# EAGLE board integrate (EAGLE 9.0.1)
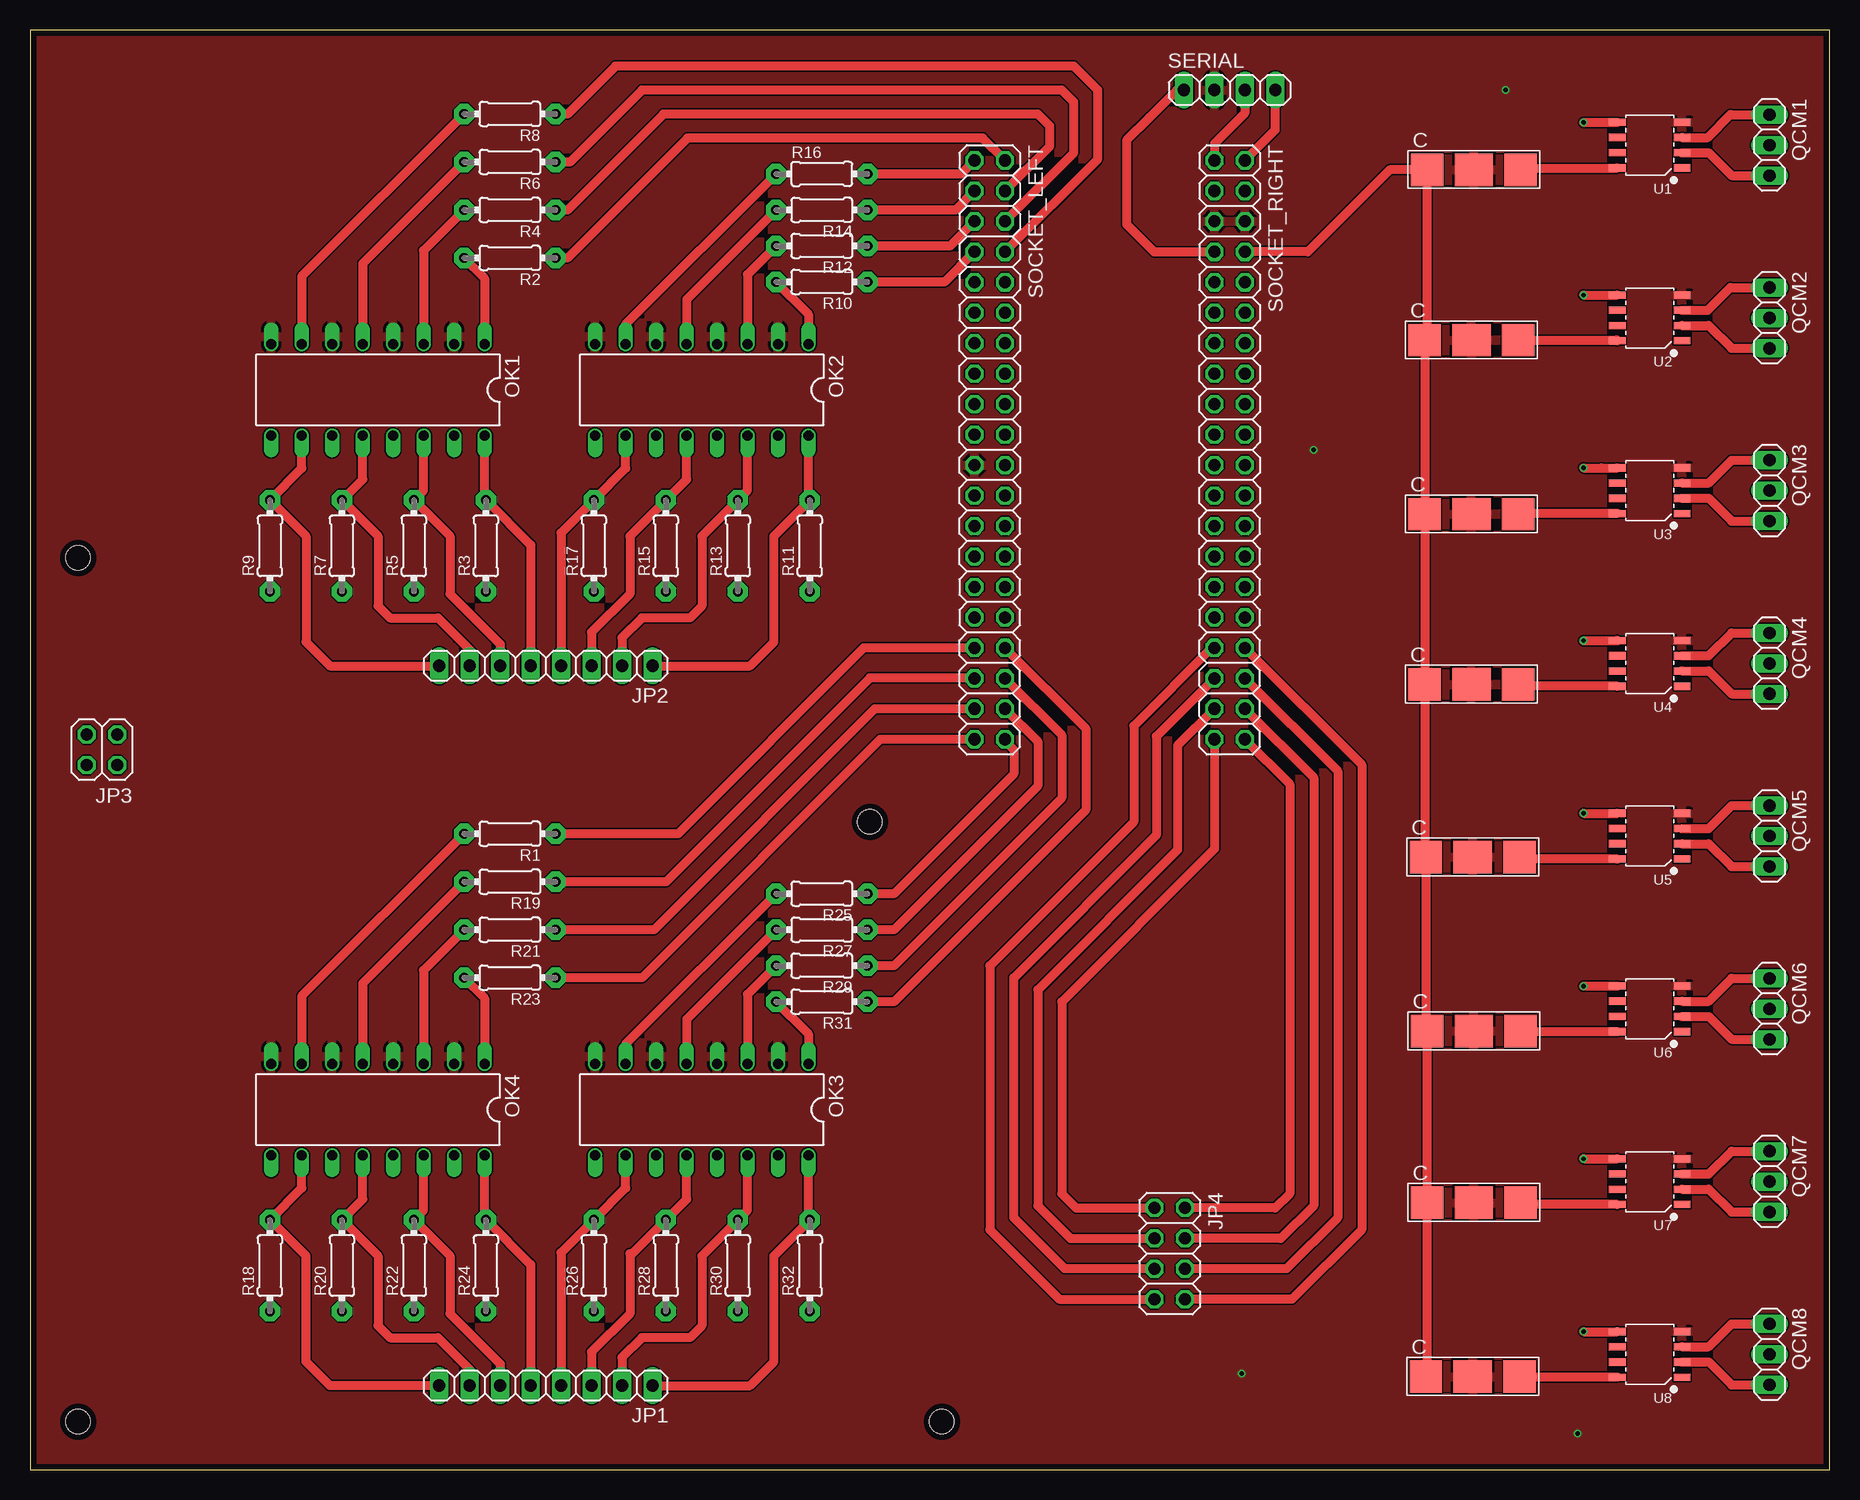
[diagram p0: board, top side]
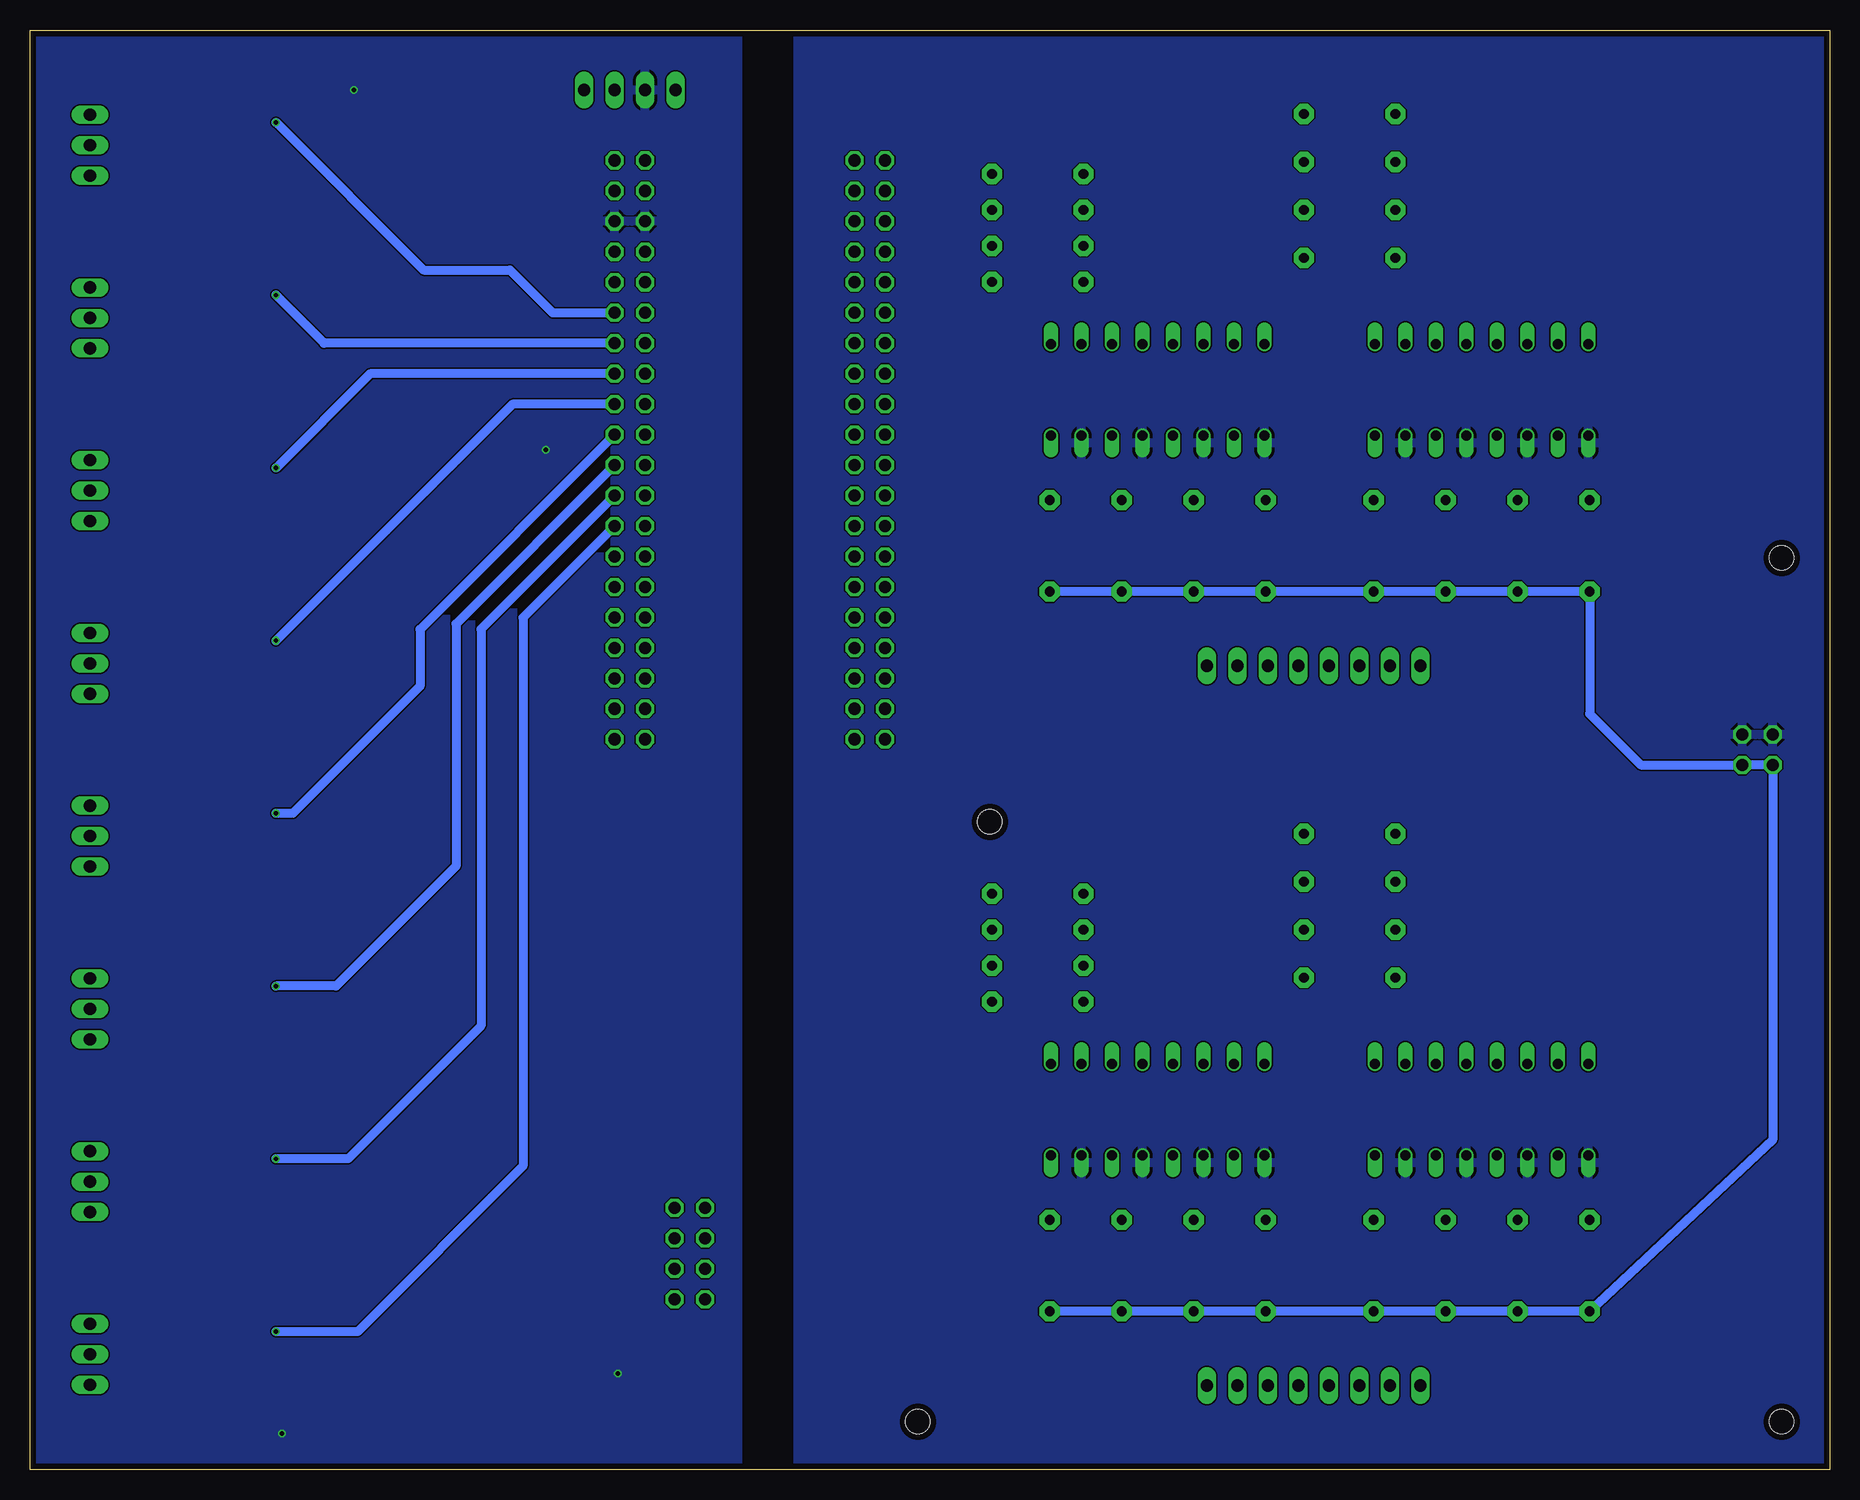
[diagram p1: board, bottom side, seen from below]

Size 150 x 120 mm. Coordinates in mm from the lower left corner, seen from the top.
Outline: 0,0 150,0 150,120 0,120 0,0
Copper layers (1*16): Top 0.035mm / dielectric 1.53mm / Bottom 0.035mm
Design rules "pban_5mil-l2": minimum track width 5mil, minimum drill 0.3mm, track to track 5mil, track to pad 0.229mm, pad to pad 5mil, via to via 5mil, smd to smd 5mil, copper to edge 0.5mm, drill to drill 0.5mm, minimum pad ring 0.15mm, minimum via ring 0.15mm, stop-mask expansion 4mil, vias tented up to drill 0.35mm, thermal gap 10mil
Net classes: 0 default: width 0.762 mm
Holes 2 mm at 4,4 76,4 4,76 70,54

## Footprints (pad centres in the part's own frame; a part is rotated, then mirrored left to right if it is on the bottom)
1X08 = drill 1.016 long: 1 -8.89,0; 2 -6.35,0; 3 -3.81,0; 4 -1.27,0; 5 1.27,0; 6 3.81,0; 7 6.35,0; 8 8.89,0
2X02 = drill 1.016 octagon: 1 -1.27,-1.27; 2 -1.27,1.27; 3 1.27,-1.27; 4 1.27,1.27
2X04 = drill 1.016 octagon: 1 -3.81,-1.27; 2 -3.81,1.27; 3 -1.27,-1.27; 4 -1.27,1.27; 5 1.27,-1.27; 6 1.27,1.27; 7 3.81,-1.27; 8 3.81,1.27
DIL16 = drill 0.813 offset: 1 -8.89,-3.81; 2 -6.35,-3.81; 3 -3.81,-3.81; 4 -1.27,-3.81; 5 1.27,-3.81; 6 3.81,-3.81; 7 6.35,-3.81; 8 8.89,-3.81; 9 8.89,3.81; 10 6.35,3.81; 11 3.81,3.81; 12 1.27,3.81; 13 -1.27,3.81; 14 -3.81,3.81; 15 -6.35,3.81; 16 -8.89,3.81
C = smd 3.2 x 2.7: MID 5.25,1.35 | smd 2.7 x 2.7: S1 1.35,1.35; S2 9.15,1.35
1X03 = drill 1.016 long: 1 -2.54,0; 2 0,0; 3 2.54,0
0204/7 = drill 0.813 pad 1.676 octagon: 1 -3.81,0; 2 3.81,0
1X04 = drill 1.016 long: 1 -3.81,0; 2 -1.27,0; 3 1.27,0; 4 3.81,0
2X20 = drill 1.016 octagon: 1 -24.13,-1.27; 2 -24.13,1.27; 3 -21.59,-1.27; 4 -21.59,1.27; 5 -19.05,-1.27; 6 -19.05,1.27; 7 -16.51,-1.27; 8 -16.51,1.27; 9 -13.97,-1.27; 10 -13.97,1.27; 11 -11.43,-1.27; 12 -11.43,1.27; 13 -8.89,-1.27; 14 -8.89,1.27; 15 -6.35,-1.27; 16 -6.35,1.27; 17 -3.81,-1.27; 18 -3.81,1.27; 19 -1.27,-1.27; 20 -1.27,1.27; 21 1.27,-1.27; 22 1.27,1.27; 23 3.81,-1.27; 24 3.81,1.27; 25 6.35,-1.27; 26 6.35,1.27; 27 8.89,-1.27; 28 8.89,1.27; 29 11.43,-1.27; 30 11.43,1.27; 31 13.97,-1.27; 32 13.97,1.27; 33 16.51,-1.27; 34 16.51,1.27; 35 19.05,-1.27; 36 19.05,1.27; 37 21.59,-1.27; 38 21.59,1.27; 39 24.13,-1.27; 40 24.13,1.27
SOIC8-1.27-5X4MM = smd 0.6 x 1.4: 1 -1.905,-2.7; 2 -0.635,-2.7; 3 0.635,-2.7; 4 1.905,-2.7; 5 1.905,2.7; 6 0.635,2.7; 7 -0.635,2.7; 8 -1.905,2.7

## Placement (x,y rotation side)
JP1  [1X08]  43,7 180 top
JP2  [1X08]  43,67 180 top
JP3  [2X02]  6,60 180 top
JP4  [2X04]  95,18 270 top
OK1  TIL199  [DIL16]  29,90 180 top
OK2  TIL199  [DIL16]  56,90 180 top
OK3  TIL199  [DIL16]  56,30 180 top
OK4  TIL199  [DIL16]  29,30 180 top
OSCILLATOR3  CSMD  [C]  115.1,107 0 top
OSCILLATOR4  CSMD  [C]  114.9,92.8 0 top
OSCILLATOR5  CSMD  [C]  114.9,78.3 0 top
OSCILLATOR6  CSMD  [C]  114.9,64.1 0 top
OSCILLATOR7  CSMD  [C]  115,49.7 0 top
OSCILLATOR8  CSMD  [C]  115.1,35.2 0 top
OSCILLATOR9  CSMD  [C]  115.1,20.9 0 top
OSCILLATOR10  CSMD  [C]  115,6.4 0 top
QCM1  [1X03]  145,110.4 270 top
QCM2  [1X03]  145,96 270 top
QCM3  [1X03]  145,81.6 270 top
QCM4  [1X03]  145,67.2 270 top
QCM5  [1X03]  145,52.8 270 top
QCM6  [1X03]  145,38.4 270 top
QCM7  [1X03]  145,24 270 top
QCM8  [1X03]  145,9.6 270 top
R1  [0204/7]  40,53 180 top
R2  [0204/7]  40,101 180 top
R3  [0204/7]  38,77 90 top
R4  [0204/7]  40,105 180 top
R5  [0204/7]  32,77 90 top
R6  [0204/7]  40,109 180 top
R7  [0204/7]  26,77 90 top
R8  [0204/7]  40,113 180 top
R9  [0204/7]  20,77 90 top
R10  [0204/7]  66,99 180 top
R11  [0204/7]  65,77 90 top
R12  [0204/7]  66,102 180 top
R13  [0204/7]  59,77 90 top
R14  [0204/7]  66,105 180 top
R15  [0204/7]  53,77 90 top
R16  [0204/7]  66,108 0 top
R17  [0204/7]  47,77 90 top
R18  [0204/7]  20,17 90 top
R19  [0204/7]  40,49 180 top
R20  [0204/7]  26,17 90 top
R21  [0204/7]  40,45 180 top
R22  [0204/7]  32,17 90 top
R23  [0204/7]  40,41 180 top
R24  [0204/7]  38,17 90 top
R25  [0204/7]  66,48 180 top
R26  [0204/7]  47,17 90 top
R27  [0204/7]  66,45 180 top
R28  [0204/7]  53,17 90 top
R29  [0204/7]  66,42 180 top
R30  [0204/7]  59,17 90 top
R31  [0204/7]  66,39 180 top
R32  [0204/7]  65,17 90 top
SERIAL  [1X04]  100,115 0 top
SOCKET_LEFT  [2X20]  80,85 270 top
SOCKET_RIGHT  [2X20]  100,85 270 top
U1  LM293D-SOIC8  [SOIC8-1.27-5X4MM]  135,110.4 90 top
U2  LM293D-SOIC8  [SOIC8-1.27-5X4MM]  135,96 90 top
U3  LM293D-SOIC8  [SOIC8-1.27-5X4MM]  135,81.6 90 top
U4  LM293D-SOIC8  [SOIC8-1.27-5X4MM]  135,67.2 90 top
U5  LM293D-SOIC8  [SOIC8-1.27-5X4MM]  135,52.8 90 top
U6  LM293D-SOIC8  [SOIC8-1.27-5X4MM]  135,38.4 90 top
U7  LM293D-SOIC8  [SOIC8-1.27-5X4MM]  135,24 90 top
U8  LM293D-SOIC8  [SOIC8-1.27-5X4MM]  135,9.6 90 top

## Library data of the parts
JP1-JP4 QCM1-QCM8 SERIAL SOCKET_LEFT SOCKET_RIGHT = pinhead
OK1-OK4 = optocoupler; MPN: TIL 199; OC_FARNELL: 1683370; OC_NEWARK: 05R6483
OSCILLATOR3-OSCILLATOR10 = my-library
R1-R32 = adafruit
U1-U8 = Seeed-IC; MPN: LM293D

## Nets
A1: JP2.5 OK1.16 R3.2
A4: JP2.8 OK1.10 R9.2
A6: JP2.2 OK2.14 R13.2
A7: JP2.3 OK2.12 R15.2
A8: JP2.4 OK2.10 R17.2
GNDH: JP3.1 JP3.3 OK1.9 OK1.11 OK1.13 OK1.15 OK2.9 OK2.11 OK2.13 OK2.15 OK3.9 OK3.11 OK3.13 OK3.15 OK4.9 OK4.11 OK4.13 OK4.15
GNDL: OK1.2 OK1.4 OK1.6 OK1.8 OK2.2 OK2.4 OK2.6 OK2.8 OK3.2 OK3.4 OK3.6 OK3.8 OK4.2 OK4.4 OK4.6 OK4.8 OSCILLATOR3.MID OSCILLATOR4.MID OSCILLATOR5.MID OSCILLATOR6.MID OSCILLATOR7.MID OSCILLATOR8.MID OSCILLATOR9.MID OSCILLATOR10.MID SERIAL.2 SOCKET_LEFT.21 SOCKET_RIGHT.5 SOCKET_RIGHT.6 U1.4 U2.4 U3.4 U4.4 U5.4 U6.4 U7.4 U8.4
N$1: JP4.8 SOCKET_RIGHT.34
N$2: R10.1 SOCKET_LEFT.7
N$3: JP4.6 SOCKET_RIGHT.36
N$4: JP4.4 SOCKET_RIGHT.38
N$5: JP4.2 SOCKET_RIGHT.40
N$6: OK4.7 R1.2
N$7: JP4.5 SOCKET_RIGHT.35
N$8: JP4.3 SOCKET_RIGHT.37
N$9: JP4.1 SOCKET_RIGHT.39
N$10: R12.1 SOCKET_LEFT.5
N$11: R14.1 SOCKET_LEFT.3
N$12: R16.2 SOCKET_LEFT.1
N$13: OK2.7 R16.1
N$14: OK2.5 R14.2
N$15: OK2.3 R12.2
N$16: OK2.1 R10.2
N$17: R2.1 SOCKET_LEFT.2
N$18: OK1.7 R8.2
N$19: OK1.1 R2.2
N$20: OK1.3 R4.2
N$21: OK1.5 R6.2
N$22: JP2.6 OK1.14 R5.2
N$23: JP2.7 OK1.12 R7.2
N$24: JP2.1 OK2.16 R11.2
N$25: R4.1 SOCKET_LEFT.4
N$26: R6.1 SOCKET_LEFT.6
N$27: R8.1 SOCKET_LEFT.8
N$28: OK4.5 R19.2
N$29: OK4.3 R21.2
N$30: OK4.1 R23.2
N$31: OK3.7 R25.2
N$32: OK3.5 R27.2
N$33: OK3.3 R29.2
N$34: OK3.1 R31.2
N$35: JP1.1 OK3.16 R32.2
N$36: JP4.7 SOCKET_RIGHT.33
N$37: JP1.2 OK3.14 R30.2
N$38: JP1.3 OK3.12 R28.2
N$39: JP1.4 OK3.10 R26.2
N$40: JP1.5 OK4.16 R24.2
N$41: JP1.6 OK4.14 R22.2
N$42: JP1.7 OK4.12 R20.2
N$43: JP1.8 OK4.10 R18.2
N$44: R31.1 SOCKET_LEFT.34
N$46: R29.1 SOCKET_LEFT.36
N$47: R27.1 SOCKET_LEFT.38
N$48: R25.1 SOCKET_LEFT.40
N$49: R23.1 SOCKET_LEFT.39
N$50: R21.1 SOCKET_LEFT.37
N$51: R19.1 SOCKET_LEFT.35
N$52: R1.1 SOCKET_LEFT.33
Q1S1: QCM1.1 U1.3
Q1S2: QCM1.3 U1.2
Q1VCC: OSCILLATOR3.S2 U1.8
Q2S1: QCM2.1 U2.3
Q2S2: QCM2.3 U2.2
Q2VCC: OSCILLATOR4.S2 U2.8
Q3S1: QCM3.1 U3.3
Q3S2: QCM3.3 U3.2
Q3VCC: OSCILLATOR5.S2 U3.8
Q4S1: QCM4.1 U4.3
Q4S2: QCM4.3 U4.2
Q4VCC: OSCILLATOR6.S2 U4.8
Q5S1: QCM5.1 U5.3
Q5S2: QCM5.3 U5.2
Q5VCC: OSCILLATOR7.S2 U5.8
Q6S1: QCM6.1 U6.3
Q6S2: QCM6.3 U6.2
Q6VCC: OSCILLATOR8.S2 U6.8
Q7S1: QCM7.1 U7.3
Q7S2: QCM7.3 U7.2
Q7VCC: OSCILLATOR9.S2 U7.8
Q8S1: QCM8.1 U8.3
Q8S2: QCM8.3 U8.2
Q8VCC: OSCILLATOR10.S2 U8.8
QCM_VCC: OSCILLATOR3.S1 OSCILLATOR4.S1 OSCILLATOR5.S1 OSCILLATOR6.S1 OSCILLATOR7.S1 OSCILLATOR8.S1 OSCILLATOR9.S1 OSCILLATOR10.S1 SOCKET_RIGHT.8
RXD: SERIAL.3 SOCKET_RIGHT.1
S1: SOCKET_RIGHT.12 U1.5
S2: SOCKET_RIGHT.14 U2.5
S3: SOCKET_RIGHT.16 U3.5
S4: SOCKET_RIGHT.18 U4.5
S5: SOCKET_RIGHT.20 U5.5
S6: SOCKET_RIGHT.22 U6.5
S7: SOCKET_RIGHT.24 U7.5
S8: SOCKET_RIGHT.26 U8.5
S_VCC: SERIAL.1 SOCKET_RIGHT.7
TXD: SERIAL.4 SOCKET_RIGHT.2
VCC_T: JP3.2 JP3.4 R3.1 R5.1 R7.1 R9.1 R11.1 R13.1 R15.1 R17.1 R18.1 R20.1 R22.1 R24.1 R26.1 R28.1 R30.1 R32.1

## Tracks (layer width: path | path; a pad name or v marks a point on that pad's centre or on a via)
A1
  Top 0.762: OK1.16 37.89,80.92 R3.2 41.73,77.08 JP2.5
A4
  Top 0.762: OK1.10 22.65,83.46 R9.2 23,77.81 23,69 25,67 JP2.8
A6
  Top 0.762: OK2.14 59.81,81.62 R13.2 56,77.81 56,72 55,71 51,71 49.35,69.35 JP2.2
A7
  Top 0.762: OK2.12 54.73,82.54 R15.2 50,77.81 50,73 | JP2.3 46.81,69.81 50,73 | 50,73
A8
  Top 0.762: OK2.10 49.65,83.46 R17.2 44.27,78.08 JP2.4
GNDH
  pour Bottom: -1,124 -1,-3 86,-3 86,124
GNDL  (via drill 0.35)
  Top 0.762: 120.2,22.4 OSCILLATOR9.MID | 120.2,36.7 OSCILLATOR8.MID | 120,65.6 OSCILLATOR6.MID | 120,94.3 OSCILLATOR4.MID | 120.1,7.9 OSCILLATOR10.MID | 120.2,108.5 OSCILLATOR3.MID | 120.1,51.2 OSCILLATOR7.MID | 120,79.8 OSCILLATOR5.MID
  other vias: 129,3 101,8 123,115 107,85
  pour Top: -2,121.9 152.9,121.9 152.9,-4.3 -2,-4.3
  pour Bottom: 154,-2 91,-2 91,123 154,123
N$1
  Top 0.762: SOCKET_RIGHT.34 111,58.76 111,20 105.19,14.19 JP4.8
N$2
  Top 0.762: SOCKET_LEFT.7 76.22,99 R10.1
N$3
  Top 0.762: SOCKET_RIGHT.36 109,58.22 109,21 104.73,16.73 JP4.6
N$4
  Top 0.762: SOCKET_RIGHT.38 107,57.68 107,22 104.27,19.27 JP4.4
N$5
  Top 0.762: SOCKET_RIGHT.40 105,57.14 105,23 103.81,21.81 JP4.2
N$6
  Top 0.762: R1.2 22.65,39.46 OK4.7
N$7
  Top 0.762: SOCKET_RIGHT.35 93.89,61.11 93.89,52.89 82,41 82,21 86.27,16.73 JP4.5
N$8
  Top 0.762: SOCKET_RIGHT.37 95.66,60.34 95.66,51.66 84,40 84,22 86.73,19.27 JP4.3
N$9
  Top 0.762: 98.73,60.73 SOCKET_RIGHT.39 98.73,51.73 86,39 86,23 87.19,21.81 JP4.1
N$10
  Top 0.762: SOCKET_LEFT.5 76.68,102 R12.1
N$11
  Top 0.762: SOCKET_LEFT.3 77.14,105 R14.1
N$12
  Top 0.762: SOCKET_LEFT.1 77.6,108 R16.2
N$13
  Top 0.762: R16.1 49.65,95.46 OK2.7
N$14
  Top 0.762: R14.2 54.73,97.54 OK2.5
N$15
  Top 0.762: R12.2 59.81,99.62 OK2.3
N$16
  Top 0.762: R10.2 64.89,96.3 OK2.1
N$17
  Top 0.762: SOCKET_LEFT.2 79.4,111 54.81,111 44.81,101 R2.1
N$18
  Top 0.762: R8.2 22.65,99.46 OK1.7
N$19
  Top 0.762: R2.2 37.89,99.3 OK1.1
N$20
  Top 0.762: R4.2 32.81,101.62 OK1.3
N$21
  Top 0.762: R6.2 27.73,100.54 OK1.5
N$22
  Top 0.762: OK1.14 32.81,81.62 R5.2 35,77.81 35,73 39.19,68.81 JP2.6
N$23
  Top 0.762: OK1.12 27.73,82.54 R7.2 29,77.81 29,72 30,71 34,71 36.65,68.35 JP2.7
N$24
  Top 0.762: OK2.16 64.89,80.92 R11.2 62,77.81 62,69 60,67 JP2.1
N$25
  Top 0.762: SOCKET_LEFT.4 85,110.32 85,112 84,113 52.81,113 44.81,105 R4.1
N$26
  Top 0.762: SOCKET_LEFT.6 87,109.78 87,114 86,115 51,115 45,109 R6.1
N$27
  Top 0.762: SOCKET_LEFT.8 89,109.24 89,115 87,117 48.81,117 44.81,113 R8.1
N$28
  Top 0.762: R19.2 27.73,40.54 OK4.5
N$29
  Top 0.762: R21.2 32.81,41.62 OK4.3
N$30
  Top 0.762: R23.2 37.89,39.3 OK4.1
N$31
  Top 0.762: R25.2 49.65,35.46 OK3.7
N$32
  Top 0.762: R27.2 54.73,37.54 OK3.5
N$33
  Top 0.762: R29.2 59.81,39.62 OK3.3
N$34
  Top 0.762: R31.2 64.89,36.3 OK3.1
N$35
  Top 0.762: OK3.16 64.89,20.92 R32.2 62,17.81 62,9 60,7 JP1.1
N$36
  Top 0.762: SOCKET_RIGHT.33 98.49,68.49 92,62 92,54 80,42 80,20 85.81,14.19 JP4.7
N$37
  Top 0.762: OK3.14 59.81,21.62 R30.2 56,17.81 56,12 55,11 51,11 49.35,9.35 JP1.2
N$38
  Top 0.762: OK3.12 54.73,22.54 R28.2 50.19,18 50,18 50,13 46.81,9.81 JP1.3
N$39
  Top 0.762: OK3.10 49.65,23.46 R26.2 44.27,18.08 JP1.4
N$40
  Top 0.762: OK4.16 37.89,20.92 R24.2 41.73,17.08 JP1.5
N$41
  Top 0.762: OK4.14 32.81,21.62 R22.2 35,17.81 35,13 39.19,8.81 JP1.6
N$42
  Top 0.762: OK4.12 27.73,22.54 R20.2 29,17.81 29,12 30,11 34,11 36.65,8.35 JP1.7
N$43
  Top 0.762: OK4.10 22.65,23.46 R18.2 23,17.81 23,9 25,7 JP1.8
N$44
  Top 0.762: SOCKET_LEFT.34 88,61.76 88,55 72,39 R31.1
N$46
  Top 0.762: SOCKET_LEFT.36 86,61.22 86,56 72,42 R29.1
N$47
  Top 0.762: SOCKET_LEFT.38 84,60.68 84,57 72,45 R27.1
N$48
  Top 0.762: R25.1 72,48 82,58 82,60 81.27,60.73 SOCKET_LEFT.40
N$49
  Top 0.762: SOCKET_LEFT.39 70.87,60.87 51,41 R23.1
N$50
  Top 0.762: SOCKET_LEFT.37 70.41,63.41 52,45 R21.1
N$51
  Top 0.762: SOCKET_LEFT.35 78.68,66 70,66 53,49 R19.1
N$52
  Top 0.762: SOCKET_LEFT.33 69.49,68.49 54,53 R1.1
Q1S1
  Top 0.762: U1.3 139.84,111.03 141.74,112.94 QCM1.1
Q1S2
  Top 0.762: U1.2 139.94,109.77 141.84,107.86 QCM1.3
Q1VCC
  Top 0.762: OSCILLATOR3.S2 124.41,108.19 124.71,108.5 U1.8
Q2S1
  Top 0.762: U2.3 139.84,96.64 141.74,98.54 QCM2.1
Q2S2
  Top 0.762: U2.2 139.94,95.36 141.84,93.46 QCM2.3
Q2VCC
  Top 0.762: 124.21,94 OSCILLATOR4.S2 132.25,94.15 U2.8
Q3S1
  Top 0.762: U3.3 139.94,82.23 141.84,84.14 QCM3.1
Q3S2
  Top 0.762: U3.2 139.94,80.97 141.84,79.06 QCM3.3
Q3VCC
  Top 0.762: OSCILLATOR5.S2 124.21,79.5 124.41,79.69 U3.8
Q4S1
  Top 0.762: U4.3 139.94,67.83 141.84,69.74 QCM4.1
Q4S2
  Top 0.762: U4.2 139.94,66.56 141.84,64.66 QCM4.3
Q4VCC
  Top 0.762: OSCILLATOR6.S2 124.21,65.3 U4.8
Q5S1
  Top 0.762: U5.3 139.94,53.44 141.84,55.34 QCM5.1
Q5S2
  Top 0.762: U5.2 139.94,52.16 141.84,50.26 QCM5.3
Q5VCC
  Top 0.762: U5.8 124.31,50.9 OSCILLATOR7.S2
Q6S1
  Top 0.762: U6.3 139.94,39.03 141.84,40.94 QCM6.1
Q6S2
  Top 0.762: U6.2 139.94,37.77 141.84,35.86 QCM6.3
Q6VCC
  Top 0.762: OSCILLATOR8.S2 124.41,36.4 124.5,36.49 U6.8
Q7S1
  Top 0.762: U7.3 139.94,24.64 141.84,26.54 QCM7.1
Q7S2
  Top 0.762: U7.2 139.94,23.36 141.84,21.46 QCM7.3
Q7VCC
  Top 0.762: OSCILLATOR9.S2 124.41,22.09 U7.8
Q8S1
  Top 0.762: U8.3 139.94,10.23 141.84,12.14 QCM8.1
Q8S2
  Top 0.762: U8.2 139.94,8.96 141.84,7.06 QCM8.3
Q8VCC
  Top 0.762: OSCILLATOR10.S2 124.31,7.59 124.41,7.7 U8.8
QCM_VCC
  Top 0.762: OSCILLATOR10.S1 116.45,7.85 OSCILLATOR9.S1 OSCILLATOR8.S1 116.35,36.65 OSCILLATOR7.S1 116.25,51.15 OSCILLATOR6.S1 OSCILLATOR5.S1 OSCILLATOR4.S1 116.45,94.35 OSCILLATOR3.S1 113.35,108.35 106.51,101.51 SOCKET_RIGHT.8
RXD
  Top 0.762: SERIAL.3 101.27,113.07 98.73,110.53 SOCKET_RIGHT.1
S1  (via drill 0.35)
  Top 0.762: v129.5,112.3 U1.5
  Bottom 0.762: v129.5,112.3 117.2,100 110,100 106.43,96.43 SOCKET_RIGHT.12
S2  (via drill 0.35)
  Top 0.762: v129.5,97.9 U2.5
  Bottom 0.762: SOCKET_RIGHT.14 125.49,93.89 v129.5,97.9
S3  (via drill 0.35)
  Top 0.762: v129.5,83.5 131,83.5 U3.5
  Bottom 0.762: SOCKET_RIGHT.16 121.65,91.35 v129.5,83.5
S4  (via drill 0.35)
  Top 0.762: v129.5,69.1 U4.5
  Bottom 0.762: SOCKET_RIGHT.18 109.79,88.81 v129.5,69.1
S5  (via drill 0.35)
  Top 0.762: v129.5,54.7 U5.5
  Bottom 0.762: SOCKET_RIGHT.20 117.5,70.04 117.5,65.3 128.1,54.7 v129.5,54.7
S6  (via drill 0.35)
  Top 0.762: v129.5,40.3 U6.5
  Bottom 0.762: SOCKET_RIGHT.22 114.5,70.5 114.5,50.3 124.5,40.3 v129.5,40.3
S7  (via drill 0.35)
  Top 0.762: v129.5,25.9 U7.5
  Bottom 0.762: SOCKET_RIGHT.24 112.4,70.06 112.4,37 123.5,25.9 v129.5,25.9
S8  (via drill 0.35)
  Top 0.762: v129.5,11.5 U8.5
  Bottom 0.762: SOCKET_RIGHT.26 108.9,71.02 108.9,25.3 122.7,11.5 v129.5,11.5
S_VCC
  Top 0.762: SERIAL.1 95.6,115 93.3,112.7 91.4,110.8 91.4,103.8 93.69,101.51 SOCKET_RIGHT.7
TXD
  Top 0.762: SOCKET_RIGHT.2 103.81,111.67 SERIAL.4
VCC_T
  Bottom 0.762: R11.1 R13.1 R15.1 R17.1 R3.1 R5.1 R7.1 R9.1 20,63 15.73,58.73 JP3.2 JP3.4 4.73,27.46 R18.1 R20.1 R22.1 R24.1 R26.1 R28.1 R30.1 R32.1